# EAGLE board MiniMoto-Panel-v10 (EAGLE 6.4), part 1 of 2
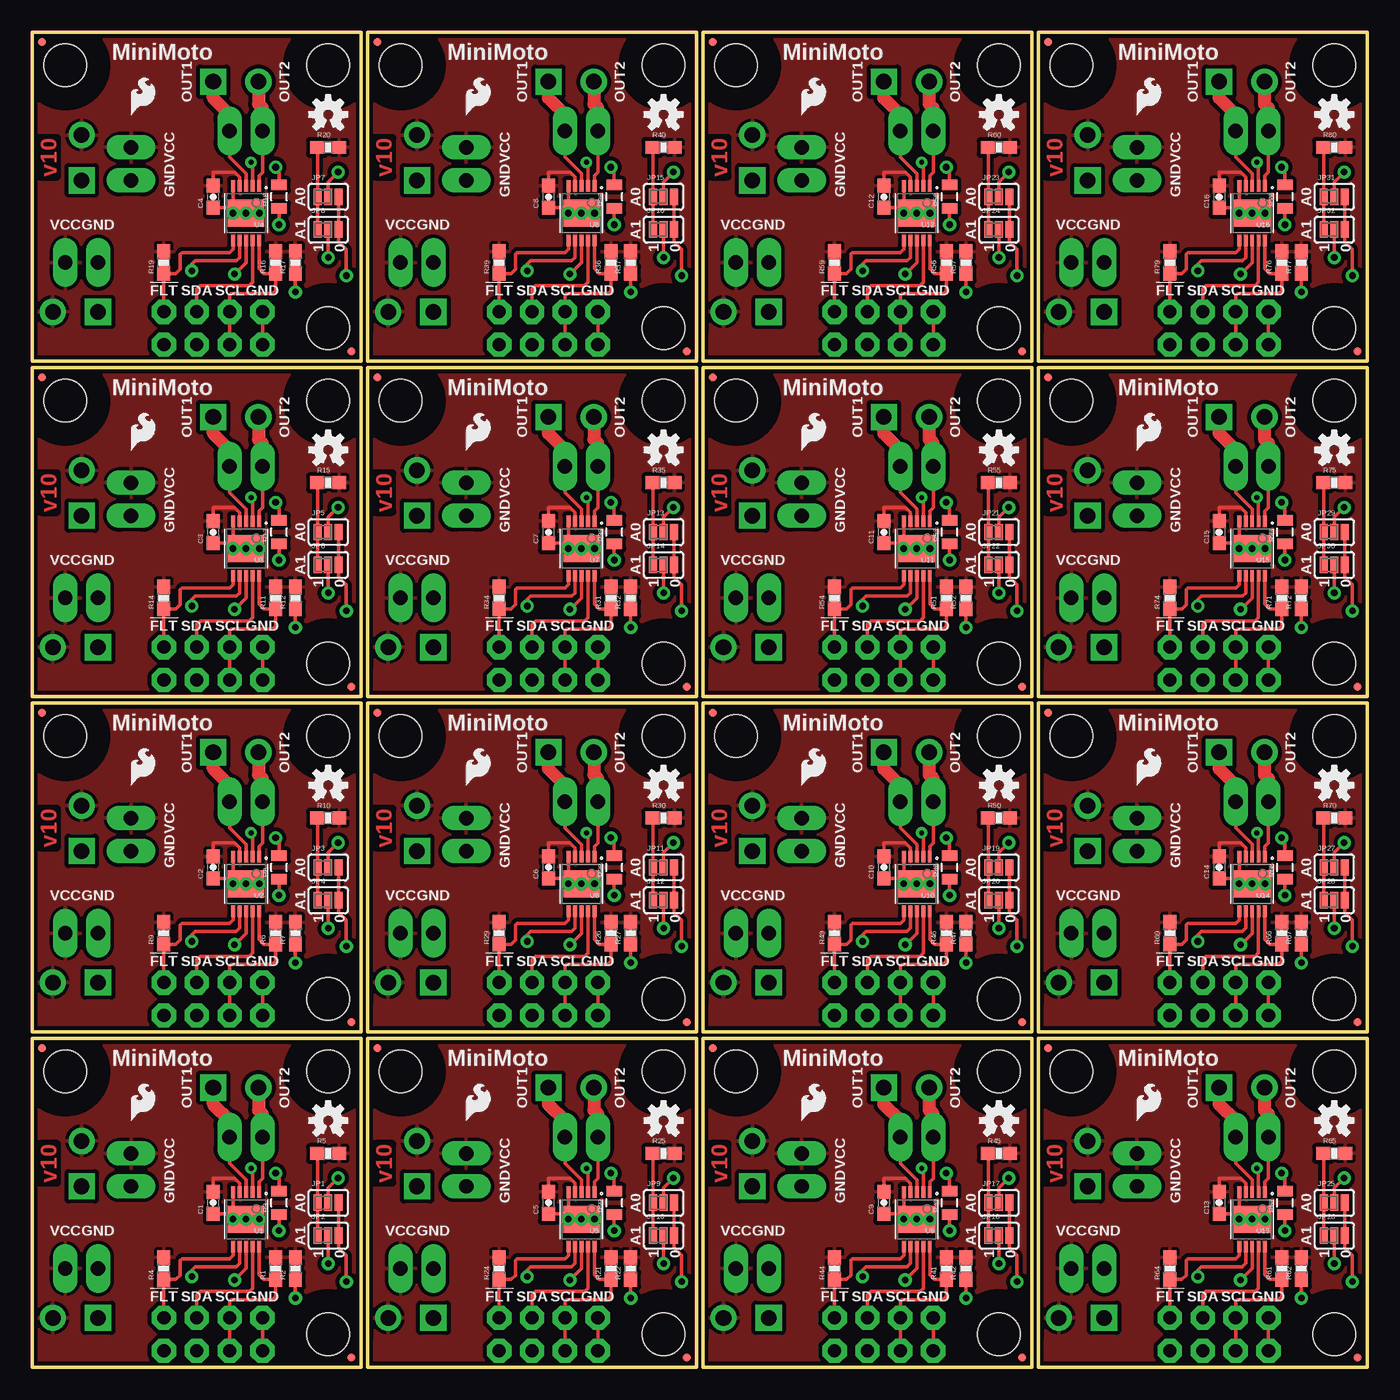
[diagram p0: board, top side]
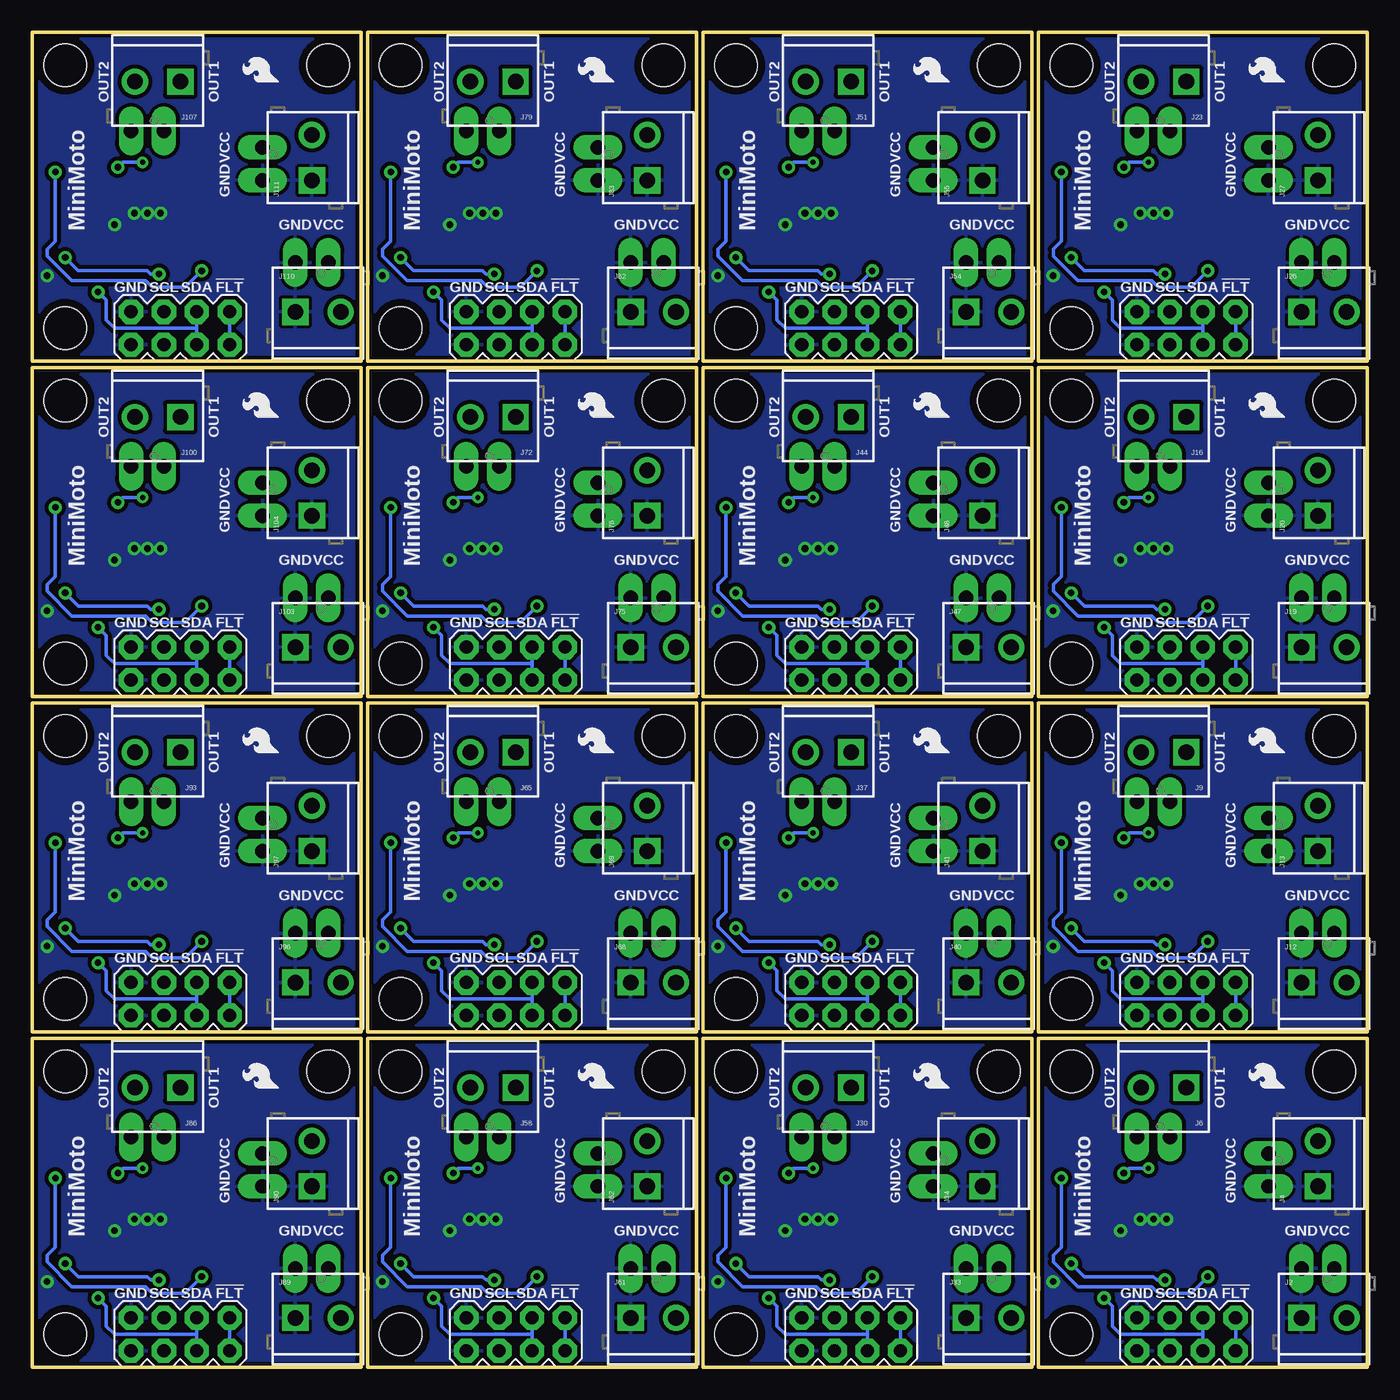
[diagram p1: board, bottom side, seen from below]

Size 103.12 x 103.12 mm. Coordinates in mm from the lower left corner, seen from the top.
Outline: 0,0 0,25.4 25.4,25.4 25.4,0 0,0
Outline: 0,25.91 0,51.31 25.4,51.31 25.4,25.91 0,25.91
Outline: 0,51.82 0,77.22 25.4,77.22 25.4,51.82 0,51.82
Outline: 0,77.72 0,103.12 25.4,103.12 25.4,77.72 0,77.72
Outline: 25.91,0 25.91,25.4 51.31,25.4 51.31,0 25.91,0
Outline: 25.91,25.91 25.91,51.31 51.31,51.31 51.31,25.91 25.91,25.91
Outline: 25.91,51.82 25.91,77.22 51.31,77.22 51.31,51.82 25.91,51.82
Outline: 25.91,77.72 25.91,103.12 51.31,103.12 51.31,77.72 25.91,77.72
Outline: 51.82,0 51.82,25.4 77.22,25.4 77.22,0 51.82,0
Outline: 51.82,25.91 51.82,51.31 77.22,51.31 77.22,25.91 51.82,25.91
Outline: 51.82,51.82 51.82,77.22 77.22,77.22 77.22,51.82 51.82,51.82
Outline: 51.82,77.72 51.82,103.12 77.22,103.12 77.22,77.72 51.82,77.72
Outline: 77.72,0 77.72,25.4 103.12,25.4 103.12,0 77.72,0
Outline: 77.72,25.91 77.72,51.31 103.12,51.31 103.12,25.91 77.72,25.91
Outline: 77.72,51.82 77.72,77.22 103.12,77.22 103.12,51.82 77.72,51.82
Outline: 77.72,77.72 77.72,103.12 103.12,103.12 103.12,77.72 77.72,77.72
Copper layers (1*16): Top 0.035mm / dielectric 1.5mm / Bottom 0.035mm
Design rules "Sparkfun": minimum track width 8mil, minimum drill 20mil, track to track 8mil, track to pad 8mil, pad to pad 8mil, via to via 8mil, smd to smd 8mil, copper to edge 8mil, drill to drill 8mil, minimum pad ring 12mil, minimum via ring 10mil, stop-mask expansion 4mil, vias tented up to drill 20mil, thermal gap 10mil
tRestrict: area -0.5,19.8 to 5.6,25.9; area 19.8,19.8 to 25.9,25.9; area 19.8,-0.5 to 25.9,5.6; area -0.5,45.7 to 5.6,51.8; area 19.8,45.7 to 25.9,51.8; area 19.8,25.4 to 25.9,31.5; area -0.5,71.6 to 5.6,77.7; area 19.8,71.6 to 25.9,77.7; area 19.8,51.3 to 25.9,57.4; area -0.5,97.5 to 5.6,103.6; area 19.8,97.5 to 25.9,103.6; area 19.8,77.2 to 25.9,83.3; area 25.4,19.8 to 31.5,25.9; area 45.7,19.8 to 51.8,25.9; area 45.7,-0.5 to 51.8,5.6; area 25.4,45.7 to 31.5,51.8; area 45.7,45.7 to 51.8,51.8; area 45.7,25.4 to 51.8,31.5; area 25.4,71.6 to 31.5,77.7; area 45.7,71.6 to 51.8,77.7; area 45.7,51.3 to 51.8,57.4; area 25.4,97.5 to 31.5,103.6; area 45.7,97.5 to 51.8,103.6; area 45.7,77.2 to 51.8,83.3; area 51.3,19.8 to 57.4,25.9; area 71.6,19.8 to 77.7,25.9; area 71.6,-0.5 to 77.7,5.6; area 51.3,45.7 to 57.4,51.8; area 71.6,45.7 to 77.7,51.8; area 71.6,25.4 to 77.7,31.5; area 51.3,71.6 to 57.4,77.7; area 71.6,71.6 to 77.7,77.7; area 71.6,51.3 to 77.7,57.4; area 51.3,97.5 to 57.4,103.6; area 71.6,97.5 to 77.7,103.6; area 71.6,77.2 to 77.7,83.3; area 77.2,19.8 to 83.3,25.9; area 97.5,19.8 to 103.6,25.9; area 97.5,-0.5 to 103.6,5.6; area 77.2,45.7 to 83.3,51.8; area 97.5,45.7 to 103.6,51.8; area 97.5,25.4 to 103.6,31.5; area 77.2,71.6 to 83.3,77.7; area 97.5,71.6 to 103.6,77.7; area 97.5,51.3 to 103.6,57.4; area 77.2,97.5 to 83.3,103.6; area 97.5,97.5 to 103.6,103.6; area 97.5,77.2 to 103.6,83.3

## Footprints (pad centres in the part's own frame; a part is rotated, then mirrored left to right if it is on the bottom)
0603-CAP = smd 1.1 x 1: 1 -0.85,0; 2 0.85,0
MICRO-FIDUCIAL = smd 0.635 x 0.635: 1 0,0
1X02_LONGPADS = drill 1.118 pad 1.88 long: 1 0,0; 2 2.54,0
SCREWTERMINAL-3.5MM-2 = drill 1.2 pad 2.032 square: 1 0,0 | drill 1.2 pad 2.032: 2 3.5,0
2X4 = drill 1.016 pad 1.88 octagon: 1 -3.81,-1.27; 2 -3.81,1.27; 3 -1.27,-1.27; 4 -1.27,1.27; 5 1.27,-1.27; 6 1.27,1.27; 7 3.81,-1.27; 8 3.81,1.27
SJ_3_PASTE1&2 = smd 0.635 x 1.27: 1 -0.813,0; 2 0,0; 3 0.813,0
0603-RES = smd 1.1 x 1: 1 -0.85,0; 2 0.85,0
0805 = smd 0.8 x 1.2: 1 -0.9,0; 2 0.9,0
STAND-OFF = hole 3.302: 0,0
MSOP-10-GNDPAD = smd 0.305 x 0.889: 1 -1,-2.11; 2 -0.5,-2.11; 3 0,-2.11; 4 0.5,-2.11; 5 1,-2.11; 6 1,2.11; 7 0.5,2.11; 8 0,2.11; 9 -0.5,2.11; 10 -1,2.11 | smd 2.794 x 2.083: GND 0,0

## Placement (x,y rotation side)
C1  0.1uF  [0603-CAP]  13.97,12.7 90 top
C2  0.1uF  [0603-CAP]  13.97,38.61 90 top
C3  0.1uF  [0603-CAP]  13.97,64.52 90 top
C4  0.1uF  [0603-CAP]  13.97,90.42 90 top
C5  0.1uF  [0603-CAP]  39.88,12.7 90 top
C6  0.1uF  [0603-CAP]  39.88,38.61 90 top
C7  0.1uF  [0603-CAP]  39.88,64.52 90 top
C8  0.1uF  [0603-CAP]  39.88,90.42 90 top
C9  0.1uF  [0603-CAP]  65.79,12.7 90 top
C10  0.1uF  [0603-CAP]  65.79,38.61 90 top
C11  0.1uF  [0603-CAP]  65.79,64.52 90 top
C12  0.1uF  [0603-CAP]  65.79,90.42 90 top
C13  0.1uF  [0603-CAP]  91.69,12.7 90 top
C14  0.1uF  [0603-CAP]  91.69,38.61 90 top
C15  0.1uF  [0603-CAP]  91.69,64.52 90 top
C16  0.1uF  [0603-CAP]  91.69,90.42 90 top
FID1  FIDUCIALUFIDUCIAL  [MICRO-FIDUCIAL]  0.76,24.64 0 top
FID2  FIDUCIALUFIDUCIAL  [MICRO-FIDUCIAL]  24.64,0.76 0 top
FID3  FIDUCIALUFIDUCIAL  [MICRO-FIDUCIAL]  0.76,50.55 0 top
FID4  FIDUCIALUFIDUCIAL  [MICRO-FIDUCIAL]  24.64,26.67 0 top
FID5  FIDUCIALUFIDUCIAL  [MICRO-FIDUCIAL]  0.76,76.45 0 top
FID6  FIDUCIALUFIDUCIAL  [MICRO-FIDUCIAL]  24.64,52.58 0 top
FID7  FIDUCIALUFIDUCIAL  [MICRO-FIDUCIAL]  0.76,102.36 0 top
FID8  FIDUCIALUFIDUCIAL  [MICRO-FIDUCIAL]  24.64,78.49 0 top
FID9  FIDUCIALUFIDUCIAL  [MICRO-FIDUCIAL]  26.67,24.64 0 top
FID10  FIDUCIALUFIDUCIAL  [MICRO-FIDUCIAL]  50.55,0.76 0 top
FID11  FIDUCIALUFIDUCIAL  [MICRO-FIDUCIAL]  26.67,50.55 0 top
FID12  FIDUCIALUFIDUCIAL  [MICRO-FIDUCIAL]  50.55,26.67 0 top
FID13  FIDUCIALUFIDUCIAL  [MICRO-FIDUCIAL]  26.67,76.45 0 top
FID14  FIDUCIALUFIDUCIAL  [MICRO-FIDUCIAL]  50.55,52.58 0 top
FID15  FIDUCIALUFIDUCIAL  [MICRO-FIDUCIAL]  26.67,102.36 0 top
FID16  FIDUCIALUFIDUCIAL  [MICRO-FIDUCIAL]  50.55,78.49 0 top
FID17  FIDUCIALUFIDUCIAL  [MICRO-FIDUCIAL]  52.58,24.64 0 top
FID18  FIDUCIALUFIDUCIAL  [MICRO-FIDUCIAL]  76.45,0.76 0 top
FID19  FIDUCIALUFIDUCIAL  [MICRO-FIDUCIAL]  52.58,50.55 0 top
FID20  FIDUCIALUFIDUCIAL  [MICRO-FIDUCIAL]  76.45,26.67 0 top
FID21  FIDUCIALUFIDUCIAL  [MICRO-FIDUCIAL]  52.58,76.45 0 top
FID22  FIDUCIALUFIDUCIAL  [MICRO-FIDUCIAL]  76.45,52.58 0 top
FID23  FIDUCIALUFIDUCIAL  [MICRO-FIDUCIAL]  52.58,102.36 0 top
FID24  FIDUCIALUFIDUCIAL  [MICRO-FIDUCIAL]  76.45,78.49 0 top
FID25  FIDUCIALUFIDUCIAL  [MICRO-FIDUCIAL]  78.49,24.64 0 top
FID26  FIDUCIALUFIDUCIAL  [MICRO-FIDUCIAL]  102.36,0.76 0 top
FID27  FIDUCIALUFIDUCIAL  [MICRO-FIDUCIAL]  78.49,50.55 0 top
FID28  FIDUCIALUFIDUCIAL  [MICRO-FIDUCIAL]  102.36,26.67 0 top
FID29  FIDUCIALUFIDUCIAL  [MICRO-FIDUCIAL]  78.49,76.45 0 top
FID30  FIDUCIALUFIDUCIAL  [MICRO-FIDUCIAL]  102.36,52.58 0 top
FID31  FIDUCIALUFIDUCIAL  [MICRO-FIDUCIAL]  78.49,102.36 0 top
FID32  FIDUCIALUFIDUCIAL  [MICRO-FIDUCIAL]  102.36,78.49 0 top
J1  M02PTH3  [1X02_LONGPADS]  5.08,7.62 0 bottom
J2  M023.5MM  [SCREWTERMINAL-3.5MM-2]  5.08,3.81 0 bottom
J3  M02PTH3  [1X02_LONGPADS]  7.62,13.97 90 top
J4  M023.5MM  [SCREWTERMINAL-3.5MM-2]  3.81,13.97 90 bottom
J5  M02PTH3  [1X02_LONGPADS]  15.24,17.78 180 bottom
J6  M023.5MM  [SCREWTERMINAL-3.5MM-2]  13.97,21.59 180 bottom
J7  M04X2  [2X4]  13.97,2.54 180 bottom
J8  M02PTH3  [1X02_LONGPADS]  15.24,43.69 180 bottom
J9  M023.5MM  [SCREWTERMINAL-3.5MM-2]  13.97,47.5 180 bottom
J10  M04X2  [2X4]  13.97,28.45 180 bottom
J11  M02PTH3  [1X02_LONGPADS]  5.08,33.53 0 bottom
J12  M023.5MM  [SCREWTERMINAL-3.5MM-2]  5.08,29.72 0 bottom
J13  M023.5MM  [SCREWTERMINAL-3.5MM-2]  3.81,39.88 90 bottom
J14  M02PTH3  [1X02_LONGPADS]  7.62,39.88 90 top
J15  M02PTH3  [1X02_LONGPADS]  15.24,69.6 180 bottom
J16  M023.5MM  [SCREWTERMINAL-3.5MM-2]  13.97,73.41 180 bottom
J17  M04X2  [2X4]  13.97,54.36 180 bottom
J18  M02PTH3  [1X02_LONGPADS]  5.08,59.44 0 bottom
J19  M023.5MM  [SCREWTERMINAL-3.5MM-2]  5.08,55.63 0 bottom
J20  M023.5MM  [SCREWTERMINAL-3.5MM-2]  3.81,65.79 90 bottom
J21  M02PTH3  [1X02_LONGPADS]  7.62,65.79 90 top
J22  M02PTH3  [1X02_LONGPADS]  15.24,95.5 180 bottom
J23  M023.5MM  [SCREWTERMINAL-3.5MM-2]  13.97,99.31 180 bottom
J24  M04X2  [2X4]  13.97,80.26 180 bottom
J25  M02PTH3  [1X02_LONGPADS]  5.08,85.34 0 bottom
J26  M023.5MM  [SCREWTERMINAL-3.5MM-2]  5.08,81.53 0 bottom
J27  M023.5MM  [SCREWTERMINAL-3.5MM-2]  3.81,91.69 90 bottom
J28  M02PTH3  [1X02_LONGPADS]  7.62,91.69 90 top
J29  M02PTH3  [1X02_LONGPADS]  41.15,17.78 180 bottom
J30  M023.5MM  [SCREWTERMINAL-3.5MM-2]  39.88,21.59 180 bottom
J31  M04X2  [2X4]  39.88,2.54 180 bottom
J32  M02PTH3  [1X02_LONGPADS]  30.99,7.62 0 bottom
J33  M023.5MM  [SCREWTERMINAL-3.5MM-2]  30.99,3.81 0 bottom
J34  M023.5MM  [SCREWTERMINAL-3.5MM-2]  29.72,13.97 90 bottom
J35  M02PTH3  [1X02_LONGPADS]  33.53,13.97 90 top
J36  M02PTH3  [1X02_LONGPADS]  41.15,43.69 180 bottom
J37  M023.5MM  [SCREWTERMINAL-3.5MM-2]  39.88,47.5 180 bottom
J38  M04X2  [2X4]  39.88,28.45 180 bottom
J39  M02PTH3  [1X02_LONGPADS]  30.99,33.53 0 bottom
J40  M023.5MM  [SCREWTERMINAL-3.5MM-2]  30.99,29.72 0 bottom
J41  M023.5MM  [SCREWTERMINAL-3.5MM-2]  29.72,39.88 90 bottom
J42  M02PTH3  [1X02_LONGPADS]  33.53,39.88 90 top
J43  M02PTH3  [1X02_LONGPADS]  41.15,69.6 180 bottom
J44  M023.5MM  [SCREWTERMINAL-3.5MM-2]  39.88,73.41 180 bottom
J45  M04X2  [2X4]  39.88,54.36 180 bottom
J46  M02PTH3  [1X02_LONGPADS]  30.99,59.44 0 bottom
J47  M023.5MM  [SCREWTERMINAL-3.5MM-2]  30.99,55.63 0 bottom
J48  M023.5MM  [SCREWTERMINAL-3.5MM-2]  29.72,65.79 90 bottom
J49  M02PTH3  [1X02_LONGPADS]  33.53,65.79 90 top
J50  M02PTH3  [1X02_LONGPADS]  41.15,95.5 180 bottom
J51  M023.5MM  [SCREWTERMINAL-3.5MM-2]  39.88,99.31 180 bottom
J52  M04X2  [2X4]  39.88,80.26 180 bottom
J53  M02PTH3  [1X02_LONGPADS]  30.99,85.34 0 bottom
J54  M023.5MM  [SCREWTERMINAL-3.5MM-2]  30.99,81.53 0 bottom
J55  M023.5MM  [SCREWTERMINAL-3.5MM-2]  29.72,91.69 90 bottom
J56  M02PTH3  [1X02_LONGPADS]  33.53,91.69 90 top
J57  M02PTH3  [1X02_LONGPADS]  67.06,17.78 180 bottom
J58  M023.5MM  [SCREWTERMINAL-3.5MM-2]  65.79,21.59 180 bottom
J59  M04X2  [2X4]  65.79,2.54 180 bottom
J60  M02PTH3  [1X02_LONGPADS]  56.9,7.62 0 bottom
J61  M023.5MM  [SCREWTERMINAL-3.5MM-2]  56.9,3.81 0 bottom
J62  M023.5MM  [SCREWTERMINAL-3.5MM-2]  55.63,13.97 90 bottom
J63  M02PTH3  [1X02_LONGPADS]  59.44,13.97 90 top
J64  M02PTH3  [1X02_LONGPADS]  67.06,43.69 180 bottom
J65  M023.5MM  [SCREWTERMINAL-3.5MM-2]  65.79,47.5 180 bottom
J66  M04X2  [2X4]  65.79,28.45 180 bottom
J67  M02PTH3  [1X02_LONGPADS]  56.9,33.53 0 bottom
J68  M023.5MM  [SCREWTERMINAL-3.5MM-2]  56.9,29.72 0 bottom
J69  M023.5MM  [SCREWTERMINAL-3.5MM-2]  55.63,39.88 90 bottom
J70  M02PTH3  [1X02_LONGPADS]  59.44,39.88 90 top
J71  M02PTH3  [1X02_LONGPADS]  67.06,69.6 180 bottom
J72  M023.5MM  [SCREWTERMINAL-3.5MM-2]  65.79,73.41 180 bottom
J73  M04X2  [2X4]  65.79,54.36 180 bottom
J74  M02PTH3  [1X02_LONGPADS]  56.9,59.44 0 bottom
J75  M023.5MM  [SCREWTERMINAL-3.5MM-2]  56.9,55.63 0 bottom
J76  M023.5MM  [SCREWTERMINAL-3.5MM-2]  55.63,65.79 90 bottom
J77  M02PTH3  [1X02_LONGPADS]  59.44,65.79 90 top
J78  M02PTH3  [1X02_LONGPADS]  67.06,95.5 180 bottom
J79  M023.5MM  [SCREWTERMINAL-3.5MM-2]  65.79,99.31 180 bottom
J80  M04X2  [2X4]  65.79,80.26 180 bottom
J81  M02PTH3  [1X02_LONGPADS]  56.9,85.34 0 bottom
J82  M023.5MM  [SCREWTERMINAL-3.5MM-2]  56.9,81.53 0 bottom
J83  M023.5MM  [SCREWTERMINAL-3.5MM-2]  55.63,91.69 90 bottom
J84  M02PTH3  [1X02_LONGPADS]  59.44,91.69 90 top
J85  M02PTH3  [1X02_LONGPADS]  92.96,17.78 180 bottom
J86  M023.5MM  [SCREWTERMINAL-3.5MM-2]  91.69,21.59 180 bottom
J87  M04X2  [2X4]  91.69,2.54 180 bottom
J88  M02PTH3  [1X02_LONGPADS]  82.8,7.62 0 bottom
J89  M023.5MM  [SCREWTERMINAL-3.5MM-2]  82.8,3.81 0 bottom
J90  M023.5MM  [SCREWTERMINAL-3.5MM-2]  81.53,13.97 90 bottom
J91  M02PTH3  [1X02_LONGPADS]  85.34,13.97 90 top
J92  M02PTH3  [1X02_LONGPADS]  92.96,43.69 180 bottom
J93  M023.5MM  [SCREWTERMINAL-3.5MM-2]  91.69,47.5 180 bottom
J94  M04X2  [2X4]  91.69,28.45 180 bottom
J95  M02PTH3  [1X02_LONGPADS]  82.8,33.53 0 bottom
J96  M023.5MM  [SCREWTERMINAL-3.5MM-2]  82.8,29.72 0 bottom
J97  M023.5MM  [SCREWTERMINAL-3.5MM-2]  81.53,39.88 90 bottom
J98  M02PTH3  [1X02_LONGPADS]  85.34,39.88 90 top
J99  M02PTH3  [1X02_LONGPADS]  92.96,69.6 180 bottom
J100  M023.5MM  [SCREWTERMINAL-3.5MM-2]  91.69,73.41 180 bottom
J101  M04X2  [2X4]  91.69,54.36 180 bottom
J102  M02PTH3  [1X02_LONGPADS]  82.8,59.44 0 bottom
J103  M023.5MM  [SCREWTERMINAL-3.5MM-2]  82.8,55.63 0 bottom
J104  M023.5MM  [SCREWTERMINAL-3.5MM-2]  81.53,65.79 90 bottom
J105  M02PTH3  [1X02_LONGPADS]  85.34,65.79 90 top
J106  M02PTH3  [1X02_LONGPADS]  92.96,95.5 180 bottom
J107  M023.5MM  [SCREWTERMINAL-3.5MM-2]  91.69,99.31 180 bottom
J108  M04X2  [2X4]  91.69,80.26 180 bottom
J109  M02PTH3  [1X02_LONGPADS]  82.8,85.34 0 bottom
J110  M023.5MM  [SCREWTERMINAL-3.5MM-2]  82.8,81.53 0 bottom
J111  M023.5MM  [SCREWTERMINAL-3.5MM-2]  81.53,91.69 90 bottom
J112  M02PTH3  [1X02_LONGPADS]  85.34,91.69 90 top
JP1  JUMPER-31-2  [SJ_3_PASTE1&2]  22.86,12.7 0 top
JP2  JUMPER-31-2  [SJ_3_PASTE1&2]  22.86,10.16 0 top
JP3  JUMPER-31-2  [SJ_3_PASTE1&2]  22.86,38.61 0 top
JP4  JUMPER-31-2  [SJ_3_PASTE1&2]  22.86,36.07 0 top
JP5  JUMPER-31-2  [SJ_3_PASTE1&2]  22.86,64.52 0 top
JP6  JUMPER-31-2  [SJ_3_PASTE1&2]  22.86,61.98 0 top
JP7  JUMPER-31-2  [SJ_3_PASTE1&2]  22.86,90.42 0 top
JP8  JUMPER-31-2  [SJ_3_PASTE1&2]  22.86,87.88 0 top
JP9  JUMPER-31-2  [SJ_3_PASTE1&2]  48.77,12.7 0 top
JP10  JUMPER-31-2  [SJ_3_PASTE1&2]  48.77,10.16 0 top
JP11  JUMPER-31-2  [SJ_3_PASTE1&2]  48.77,38.61 0 top
JP12  JUMPER-31-2  [SJ_3_PASTE1&2]  48.77,36.07 0 top
JP13  JUMPER-31-2  [SJ_3_PASTE1&2]  48.77,64.52 0 top
JP14  JUMPER-31-2  [SJ_3_PASTE1&2]  48.77,61.98 0 top
JP15  JUMPER-31-2  [SJ_3_PASTE1&2]  48.77,90.42 0 top
JP16  JUMPER-31-2  [SJ_3_PASTE1&2]  48.77,87.88 0 top
JP17  JUMPER-31-2  [SJ_3_PASTE1&2]  74.68,12.7 0 top
JP18  JUMPER-31-2  [SJ_3_PASTE1&2]  74.68,10.16 0 top
JP19  JUMPER-31-2  [SJ_3_PASTE1&2]  74.68,38.61 0 top
JP20  JUMPER-31-2  [SJ_3_PASTE1&2]  74.68,36.07 0 top
JP21  JUMPER-31-2  [SJ_3_PASTE1&2]  74.68,64.52 0 top
JP22  JUMPER-31-2  [SJ_3_PASTE1&2]  74.68,61.98 0 top
JP23  JUMPER-31-2  [SJ_3_PASTE1&2]  74.68,90.42 0 top
JP24  JUMPER-31-2  [SJ_3_PASTE1&2]  74.68,87.88 0 top
JP25  JUMPER-31-2  [SJ_3_PASTE1&2]  100.58,12.7 0 top
JP26  JUMPER-31-2  [SJ_3_PASTE1&2]  100.58,10.16 0 top
JP27  JUMPER-31-2  [SJ_3_PASTE1&2]  100.58,38.61 0 top
JP28  JUMPER-31-2  [SJ_3_PASTE1&2]  100.58,36.07 0 top
JP29  JUMPER-31-2  [SJ_3_PASTE1&2]  100.58,64.52 0 top
JP30  JUMPER-31-2  [SJ_3_PASTE1&2]  100.58,61.98 0 top
JP31  JUMPER-31-2  [SJ_3_PASTE1&2]  100.58,90.42 0 top
JP32  JUMPER-31-2  [SJ_3_PASTE1&2]  100.58,87.88 0 top
LOGO1  LOGO-SFESK  [SFE-LOGO-FLAME]  7.62,19.05 0 top
LOGO2  OSHW-LOGOS  [OSHW-LOGO-S]  22.86,19.05 0 top
LOGO3  LOGO-SFESK  [SFE-LOGO-FLAME]  6.35,21.59 90 bottom
LOGO4  OSHW-LOGOS  [OSHW-LOGO-S]  22.86,44.96 0 top
LOGO5  LOGO-SFESK  [SFE-LOGO-FLAME]  7.62,44.96 0 top
LOGO6  LOGO-SFESK  [SFE-LOGO-FLAME]  6.35,47.5 90 bottom
LOGO7  OSHW-LOGOS  [OSHW-LOGO-S]  22.86,70.87 0 top
LOGO8  LOGO-SFESK  [SFE-LOGO-FLAME]  7.62,70.87 0 top
LOGO9  LOGO-SFESK  [SFE-LOGO-FLAME]  6.35,73.41 90 bottom
LOGO10  OSHW-LOGOS  [OSHW-LOGO-S]  22.86,96.77 0 top
LOGO11  LOGO-SFESK  [SFE-LOGO-FLAME]  7.62,96.77 0 top
LOGO12  LOGO-SFESK  [SFE-LOGO-FLAME]  6.35,99.31 90 bottom
LOGO13  OSHW-LOGOS  [OSHW-LOGO-S]  48.77,19.05 0 top
LOGO14  LOGO-SFESK  [SFE-LOGO-FLAME]  33.53,19.05 0 top
LOGO15  LOGO-SFESK  [SFE-LOGO-FLAME]  32.26,21.59 90 bottom
LOGO16  OSHW-LOGOS  [OSHW-LOGO-S]  48.77,44.96 0 top
LOGO17  LOGO-SFESK  [SFE-LOGO-FLAME]  33.53,44.96 0 top
LOGO18  LOGO-SFESK  [SFE-LOGO-FLAME]  32.26,47.5 90 bottom
LOGO19  OSHW-LOGOS  [OSHW-LOGO-S]  48.77,70.87 0 top
LOGO20  LOGO-SFESK  [SFE-LOGO-FLAME]  33.53,70.87 0 top
LOGO21  LOGO-SFESK  [SFE-LOGO-FLAME]  32.26,73.41 90 bottom
LOGO22  OSHW-LOGOS  [OSHW-LOGO-S]  48.77,96.77 0 top
LOGO23  LOGO-SFESK  [SFE-LOGO-FLAME]  33.53,96.77 0 top
LOGO24  LOGO-SFESK  [SFE-LOGO-FLAME]  32.26,99.31 90 bottom
LOGO25  OSHW-LOGOS  [OSHW-LOGO-S]  74.68,19.05 0 top
LOGO26  LOGO-SFESK  [SFE-LOGO-FLAME]  59.44,19.05 0 top
LOGO27  LOGO-SFESK  [SFE-LOGO-FLAME]  58.17,21.59 90 bottom
LOGO28  OSHW-LOGOS  [OSHW-LOGO-S]  74.68,44.96 0 top
LOGO29  LOGO-SFESK  [SFE-LOGO-FLAME]  59.44,44.96 0 top
LOGO30  LOGO-SFESK  [SFE-LOGO-FLAME]  58.17,47.5 90 bottom
LOGO31  OSHW-LOGOS  [OSHW-LOGO-S]  74.68,70.87 0 top
LOGO32  LOGO-SFESK  [SFE-LOGO-FLAME]  59.44,70.87 0 top
LOGO33  LOGO-SFESK  [SFE-LOGO-FLAME]  58.17,73.41 90 bottom
LOGO34  OSHW-LOGOS  [OSHW-LOGO-S]  74.68,96.77 0 top
LOGO35  LOGO-SFESK  [SFE-LOGO-FLAME]  59.44,96.77 0 top
LOGO36  LOGO-SFESK  [SFE-LOGO-FLAME]  58.17,99.31 90 bottom
LOGO37  OSHW-LOGOS  [OSHW-LOGO-S]  100.58,19.05 0 top
LOGO38  LOGO-SFESK  [SFE-LOGO-FLAME]  85.34,19.05 0 top
LOGO39  LOGO-SFESK  [SFE-LOGO-FLAME]  84.07,21.59 90 bottom
LOGO40  OSHW-LOGOS  [OSHW-LOGO-S]  100.58,44.96 0 top
LOGO41  LOGO-SFESK  [SFE-LOGO-FLAME]  85.34,44.96 0 top
LOGO42  LOGO-SFESK  [SFE-LOGO-FLAME]  84.07,47.5 90 bottom
LOGO43  OSHW-LOGOS  [OSHW-LOGO-S]  100.58,70.87 0 top
LOGO44  LOGO-SFESK  [SFE-LOGO-FLAME]  85.34,70.87 0 top
LOGO45  LOGO-SFESK  [SFE-LOGO-FLAME]  84.07,73.41 90 bottom
LOGO46  OSHW-LOGOS  [OSHW-LOGO-S]  100.58,96.77 0 top
LOGO47  LOGO-SFESK  [SFE-LOGO-FLAME]  85.34,96.77 0 top
LOGO48  LOGO-SFESK  [SFE-LOGO-FLAME]  84.07,99.31 90 bottom
R1  1K  [0603-RES]  18.8,7.62 90 top
R2  1K  [0603-RES]  20.32,7.62 90 top
R3  0.22  [0805]  19.05,12.7 90 top
R4  10K  [0603-RES]  10.16,7.62 90 top
R5  10K  [0603-RES]  22.86,16.51 0 top
R6  1K  [0603-RES]  18.8,33.53 90 top
R7  1K  [0603-RES]  20.32,33.53 90 top
R8  0.22  [0805]  19.05,38.61 90 top
R9  10K  [0603-RES]  10.16,33.53 90 top
R10  10K  [0603-RES]  22.86,42.42 0 top
R11  1K  [0603-RES]  18.8,59.44 90 top
R12  1K  [0603-RES]  20.32,59.44 90 top
R13  0.22  [0805]  19.05,64.52 90 top
R14  10K  [0603-RES]  10.16,59.44 90 top
R15  10K  [0603-RES]  22.86,68.33 0 top
R16  1K  [0603-RES]  18.8,85.34 90 top
R17  1K  [0603-RES]  20.32,85.34 90 top
R18  0.22  [0805]  19.05,90.42 90 top
R19  10K  [0603-RES]  10.16,85.34 90 top
R20  10K  [0603-RES]  22.86,94.23 0 top
R21  1K  [0603-RES]  44.7,7.62 90 top
R22  1K  [0603-RES]  46.23,7.62 90 top
R23  0.22  [0805]  44.96,12.7 90 top
R24  10K  [0603-RES]  36.07,7.62 90 top
R25  10K  [0603-RES]  48.77,16.51 0 top
R26  1K  [0603-RES]  44.7,33.53 90 top
R27  1K  [0603-RES]  46.23,33.53 90 top
R28  0.22  [0805]  44.96,38.61 90 top
R29  10K  [0603-RES]  36.07,33.53 90 top
R30  10K  [0603-RES]  48.77,42.42 0 top
R31  1K  [0603-RES]  44.7,59.44 90 top
R32  1K  [0603-RES]  46.23,59.44 90 top
R33  0.22  [0805]  44.96,64.52 90 top
R34  10K  [0603-RES]  36.07,59.44 90 top
R35  10K  [0603-RES]  48.77,68.33 0 top
R36  1K  [0603-RES]  44.7,85.34 90 top
R37  1K  [0603-RES]  46.23,85.34 90 top
R38  0.22  [0805]  44.96,90.42 90 top
R39  10K  [0603-RES]  36.07,85.34 90 top
R40  10K  [0603-RES]  48.77,94.23 0 top
R41  1K  [0603-RES]  70.61,7.62 90 top
R42  1K  [0603-RES]  72.14,7.62 90 top
R43  0.22  [0805]  70.87,12.7 90 top
R44  10K  [0603-RES]  61.98,7.62 90 top
R45  10K  [0603-RES]  74.68,16.51 0 top
R46  1K  [0603-RES]  70.61,33.53 90 top
R47  1K  [0603-RES]  72.14,33.53 90 top
R48  0.22  [0805]  70.87,38.61 90 top
R49  10K  [0603-RES]  61.98,33.53 90 top
R50  10K  [0603-RES]  74.68,42.42 0 top
R51  1K  [0603-RES]  70.61,59.44 90 top
R52  1K  [0603-RES]  72.14,59.44 90 top
R53  0.22  [0805]  70.87,64.52 90 top
R54  10K  [0603-RES]  61.98,59.44 90 top
R55  10K  [0603-RES]  74.68,68.33 0 top
R56  1K  [0603-RES]  70.61,85.34 90 top
R57  1K  [0603-RES]  72.14,85.34 90 top
R58  0.22  [0805]  70.87,90.42 90 top
R59  10K  [0603-RES]  61.98,85.34 90 top
R60  10K  [0603-RES]  74.68,94.23 0 top
R61  1K  [0603-RES]  96.52,7.62 90 top
R62  1K  [0603-RES]  98.04,7.62 90 top
R63  0.22  [0805]  96.77,12.7 90 top
R64  10K  [0603-RES]  87.88,7.62 90 top
R65  10K  [0603-RES]  100.58,16.51 0 top
R66  1K  [0603-RES]  96.52,33.53 90 top
R67  1K  [0603-RES]  98.04,33.53 90 top
R68  0.22  [0805]  96.77,38.61 90 top
R69  10K  [0603-RES]  87.88,33.53 90 top
R70  10K  [0603-RES]  100.58,42.42 0 top
R71  1K  [0603-RES]  96.52,59.44 90 top
R72  1K  [0603-RES]  98.04,59.44 90 top
R73  0.22  [0805]  96.77,64.52 90 top
R74  10K  [0603-RES]  87.88,59.44 90 top
R75  10K  [0603-RES]  100.58,68.33 0 top
R76  1K  [0603-RES]  96.52,85.34 90 top
R77  1K  [0603-RES]  98.04,85.34 90 top
R78  0.22  [0805]  96.77,90.42 90 top
R79  10K  [0603-RES]  87.88,85.34 90 top
R80  10K  [0603-RES]  100.58,94.23 0 top
STANDOFF1  STAND-OFF  [STAND-OFF]  2.54,22.86 0 top
STANDOFF2  STAND-OFF  [STAND-OFF]  22.86,22.86 0 top
STANDOFF3  STAND-OFF  [STAND-OFF]  22.86,2.54 0 top
STANDOFF4  STAND-OFF  [STAND-OFF]  2.54,48.77 0 top
STANDOFF5  STAND-OFF  [STAND-OFF]  22.86,48.77 0 top
STANDOFF6  STAND-OFF  [STAND-OFF]  22.86,28.45 0 top
STANDOFF7  STAND-OFF  [STAND-OFF]  2.54,74.68 0 top
STANDOFF8  STAND-OFF  [STAND-OFF]  22.86,74.68 0 top
STANDOFF9  STAND-OFF  [STAND-OFF]  22.86,54.36 0 top
STANDOFF10  STAND-OFF  [STAND-OFF]  2.54,100.58 0 top
STANDOFF11  STAND-OFF  [STAND-OFF]  22.86,100.58 0 top
STANDOFF12  STAND-OFF  [STAND-OFF]  22.86,80.26 0 top
STANDOFF13  STAND-OFF  [STAND-OFF]  28.45,22.86 0 top
STANDOFF14  STAND-OFF  [STAND-OFF]  48.77,22.86 0 top
STANDOFF15  STAND-OFF  [STAND-OFF]  48.77,2.54 0 top
STANDOFF16  STAND-OFF  [STAND-OFF]  28.45,48.77 0 top
STANDOFF17  STAND-OFF  [STAND-OFF]  48.77,48.77 0 top
STANDOFF18  STAND-OFF  [STAND-OFF]  48.77,28.45 0 top
STANDOFF19  STAND-OFF  [STAND-OFF]  28.45,74.68 0 top
STANDOFF20  STAND-OFF  [STAND-OFF]  48.77,74.68 0 top
STANDOFF21  STAND-OFF  [STAND-OFF]  48.77,54.36 0 top
STANDOFF22  STAND-OFF  [STAND-OFF]  28.45,100.58 0 top
STANDOFF23  STAND-OFF  [STAND-OFF]  48.77,100.58 0 top
STANDOFF24  STAND-OFF  [STAND-OFF]  48.77,80.26 0 top
STANDOFF25  STAND-OFF  [STAND-OFF]  54.36,22.86 0 top
STANDOFF26  STAND-OFF  [STAND-OFF]  74.68,22.86 0 top
STANDOFF27  STAND-OFF  [STAND-OFF]  74.68,2.54 0 top
STANDOFF28  STAND-OFF  [STAND-OFF]  54.36,48.77 0 top
STANDOFF29  STAND-OFF  [STAND-OFF]  74.68,48.77 0 top
STANDOFF30  STAND-OFF  [STAND-OFF]  74.68,28.45 0 top
STANDOFF31  STAND-OFF  [STAND-OFF]  54.36,74.68 0 top
STANDOFF32  STAND-OFF  [STAND-OFF]  74.68,74.68 0 top
STANDOFF33  STAND-OFF  [STAND-OFF]  74.68,54.36 0 top
STANDOFF34  STAND-OFF  [STAND-OFF]  54.36,100.58 0 top
STANDOFF35  STAND-OFF  [STAND-OFF]  74.68,100.58 0 top
STANDOFF36  STAND-OFF  [STAND-OFF]  74.68,80.26 0 top
STANDOFF37  STAND-OFF  [STAND-OFF]  80.26,22.86 0 top
STANDOFF38  STAND-OFF  [STAND-OFF]  100.58,22.86 0 top
STANDOFF39  STAND-OFF  [STAND-OFF]  100.58,2.54 0 top
STANDOFF40  STAND-OFF  [STAND-OFF]  80.26,48.77 0 top
STANDOFF41  STAND-OFF  [STAND-OFF]  100.58,48.77 0 top
STANDOFF42  STAND-OFF  [STAND-OFF]  100.58,28.45 0 top
STANDOFF43  STAND-OFF  [STAND-OFF]  80.26,74.68 0 top
STANDOFF44  STAND-OFF  [STAND-OFF]  100.58,74.68 0 top
STANDOFF45  STAND-OFF  [STAND-OFF]  100.58,54.36 0 top
STANDOFF46  STAND-OFF  [STAND-OFF]  80.26,100.58 0 top
STANDOFF47  STAND-OFF  [STAND-OFF]  100.58,100.58 0 top
STANDOFF48  STAND-OFF  [STAND-OFF]  100.58,80.26 0 top
U1  DRV8830  [MSOP-10-GNDPAD]  16.51,11.43 180 top
U2  DRV8830  [MSOP-10-GNDPAD]  16.51,37.34 180 top
U3  DRV8830  [MSOP-10-GNDPAD]  16.51,63.25 180 top
U4  DRV8830  [MSOP-10-GNDPAD]  16.51,89.15 180 top
U5  DRV8830  [MSOP-10-GNDPAD]  42.42,11.43 180 top
U6  DRV8830  [MSOP-10-GNDPAD]  42.42,37.34 180 top
U7  DRV8830  [MSOP-10-GNDPAD]  42.42,63.25 180 top
U8  DRV8830  [MSOP-10-GNDPAD]  42.42,89.15 180 top
U9  DRV8830  [MSOP-10-GNDPAD]  68.33,11.43 180 top
U10  DRV8830  [MSOP-10-GNDPAD]  68.33,37.34 180 top
U11  DRV8830  [MSOP-10-GNDPAD]  68.33,63.25 180 top
U12  DRV8830  [MSOP-10-GNDPAD]  68.33,89.15 180 top
U13  DRV8830  [MSOP-10-GNDPAD]  94.23,11.43 180 top
U14  DRV8830  [MSOP-10-GNDPAD]  94.23,37.34 180 top
U15  DRV8830  [MSOP-10-GNDPAD]  94.23,63.25 180 top
U16  DRV8830  [MSOP-10-GNDPAD]  94.23,89.15 180 top

## Library data of the parts
C1-C16 = SparkFun-Capacitors; PROD_ID: CAP-00810
FID1-FID32 LOGO1-LOGO48 = SparkFun-Aesthetics
J1-J112 = SparkFun-Connectors
JP1-JP32 = SparkFun-Passives
R1 R2 R6 R7 R11 R12 R16 R17 R21 R22 R26 R27 R31 R32 R36 R37 R41 R42 R46 R47 R51 R52 R56 R57 R61 R62 R66 R67 R71 R72 R76 R77 = SparkFun-Resistors; PROD_ID: RES-07856
R3 R8 R13 R18 R23 R28 R33 R38 R43 R48 R53 R58 R63 R68 R73 R78 = SparkFun-Resistors; PROD_ID: RES-09883
R4 R5 R9 R10 R14 R15 R19 R20 R24 R25 R29 R30 R34 R35 R39 R40 R44 R45 R49 R50 R54 R55 R59 R60 R64 R65 R69 R70 R74 R75 R79 R80 = SparkFun-Resistors; PROD_ID: RES-00824
STANDOFF1-STANDOFF48 = SparkFun-Electromechanical
U1-U16 = SparkFun-PowerIC

## Nets
!FAULT: J7.1 J7.2 R4.1 U1.6
!FAULT1: J10.1 J10.2 R9.1 U2.6
!FAULT2: J17.1 J17.2 R14.1 U3.6
!FAULT3: J24.1 J24.2 R19.1 U4.6
!FAULT4: J31.1 J31.2 R24.1 U5.6
!FAULT5: J38.1 J38.2 R29.1 U6.6
!FAULT6: J45.1 J45.2 R34.1 U7.6
!FAULT7: J52.1 J52.2 R39.1 U8.6
!FAULT8: J59.1 J59.2 R44.1 U9.6
!FAULT9: J66.1 J66.2 R49.1 U10.6
!FAULT10: J73.1 J73.2 R54.1 U11.6
!FAULT11: J80.1 J80.2 R59.1 U12.6
!FAULT12: J87.1 J87.2 R64.1 U13.6
!FAULT13: J94.1 J94.2 R69.1 U14.6
!FAULT14: J101.1 J101.2 R74.1 U15.6
!FAULT15: J108.1 J108.2 R79.1 U16.6
A0: JP1.2 U1.7
A1: JP2.2 U1.8
A2: JP3.2 U2.7
A3: JP4.2 U2.8
A4: JP5.2 U3.7
A5: JP6.2 U3.8
A6: JP7.2 U4.7
A7: JP8.2 U4.8
A8: JP9.2 U5.7
A9: JP10.2 U5.8
A10: JP11.2 U6.7
A11: JP12.2 U6.8
A12: JP13.2 U7.7
A13: JP14.2 U7.8
A14: JP15.2 U8.7
A15: JP16.2 U8.8
A16: JP17.2 U9.7
A17: JP18.2 U9.8
A18: JP19.2 U10.7
A19: JP20.2 U10.8
A20: JP21.2 U11.7
A21: JP22.2 U11.8
A22: JP23.2 U12.7
A23: JP24.2 U12.8
A24: JP25.2 U13.7
A25: JP26.2 U13.8
A26: JP27.2 U14.7
A27: JP28.2 U14.8
A28: JP29.2 U15.7
A29: JP30.2 U15.8
A30: JP31.2 U16.7
A31: JP32.2 U16.8
GND: C1.1 J1.1 J2.1 J3.1 J4.1 J7.7 J7.8 JP1.3 JP2.3 R3.1 U1.5 U1.GND
GND1: C2.1 J10.7 J10.8 J11.1 J12.1 J13.1 J14.1 JP3.3 JP4.3 R8.1 U2.5 U2.GND
GND2: C3.1 J17.7 J17.8 J18.1 J19.1 J20.1 J21.1 JP5.3 JP6.3 R13.1 U3.5 U3.GND
GND3: C4.1 J24.7 J24.8 J25.1 J26.1 J27.1 J28.1 JP7.3 JP8.3 R18.1 U4.5 U4.GND
GND4: C5.1 J31.7 J31.8 J32.1 J33.1 J34.1 J35.1 JP9.3 JP10.3 R23.1 U5.5 U5.GND
GND5: C6.1 J38.7 J38.8 J39.1 J40.1 J41.1 J42.1 JP11.3 JP12.3 R28.1 U6.5 U6.GND
GND6: C7.1 J45.7 J45.8 J46.1 J47.1 J48.1 J49.1 JP13.3 JP14.3 R33.1 U7.5 U7.GND
GND7: C8.1 J52.7 J52.8 J53.1 J54.1 J55.1 J56.1 JP15.3 JP16.3 R38.1 U8.5 U8.GND
GND8: C9.1 J59.7 J59.8 J60.1 J61.1 J62.1 J63.1 JP17.3 JP18.3 R43.1 U9.5 U9.GND
GND9: C10.1 J66.7 J66.8 J67.1 J68.1 J69.1 J70.1 JP19.3 JP20.3 R48.1 U10.5 U10.GND
GND10: C11.1 J73.7 J73.8 J74.1 J75.1 J76.1 J77.1 JP21.3 JP22.3 R53.1 U11.5 U11.GND
GND11: C12.1 J80.7 J80.8 J81.1 J82.1 J83.1 J84.1 JP23.3 JP24.3 R58.1 U12.5 U12.GND
GND12: C13.1 J87.7 J87.8 J88.1 J89.1 J90.1 J91.1 JP25.3 JP26.3 R63.1 U13.5 U13.GND
GND13: C14.1 J94.7 J94.8 J95.1 J96.1 J97.1 J98.1 JP27.3 JP28.3 R68.1 U14.5 U14.GND
GND14: C15.1 J101.7 J101.8 J102.1 J103.1 J104.1 J105.1 JP29.3 JP30.3 R73.1 U15.5 U15.GND
GND15: C16.1 J108.7 J108.8 J109.1 J110.1 J111.1 J112.1 JP31.3 JP32.3 R78.1 U16.5 U16.GND
N$1: JP1.1 JP2.1 R5.1
N$2: R8.2 U2.2
N$3: R3.2 U1.2
N$4: JP3.1 JP4.1 R10.1
N$5: R13.2 U3.2
N$6: JP5.1 JP6.1 R15.1
N$7: R18.2 U4.2
N$8: JP7.1 JP8.1 R20.1
N$9: R23.2 U5.2
N$10: JP9.1 JP10.1 R25.1
N$11: R28.2 U6.2
N$12: JP11.1 JP12.1 R30.1
N$13: R33.2 U7.2
N$14: JP13.1 JP14.1 R35.1
N$15: R38.2 U8.2
N$16: JP15.1 JP16.1 R40.1
N$17: R43.2 U9.2
N$18: JP17.1 JP18.1 R45.1
N$19: R48.2 U10.2
N$20: JP19.1 JP20.1 R50.1
N$21: R53.2 U11.2
N$22: JP21.1 JP22.1 R55.1
N$23: R58.2 U12.2
N$24: JP23.1 JP24.1 R60.1
N$25: R63.2 U13.2
N$26: JP25.1 JP26.1 R65.1
N$27: R68.2 U14.2
N$28: JP27.1 JP28.1 R70.1
N$29: R73.2 U15.2
N$30: JP29.1 JP30.1 R75.1
N$31: R78.2 U16.2
N$32: JP31.1 JP32.1 R80.1
OUT1: J5.1 J6.1 U1.3
OUT2: J5.2 J6.2 U1.1
OUT3: J8.1 J9.1 U2.3
OUT4: J8.2 J9.2 U2.1
OUT5: J15.1 J16.1 U3.3
OUT6: J15.2 J16.2 U3.1
OUT7: J22.1 J23.1 U4.3
OUT8: J22.2 J23.2 U4.1
OUT9: J29.1 J30.1 U5.3
OUT10: J29.2 J30.2 U5.1
OUT11: J36.1 J37.1 U6.3
OUT12: J36.2 J37.2 U6.1
OUT13: J43.1 J44.1 U7.3
OUT14: J43.2 J44.2 U7.1
OUT15: J50.1 J51.1 U8.3
OUT16: J50.2 J51.2 U8.1
OUT17: J57.1 J58.1 U9.3
OUT18: J57.2 J58.2 U9.1
OUT19: J64.1 J65.1 U10.3
OUT20: J64.2 J65.2 U10.1
OUT21: J71.1 J72.1 U11.3
OUT22: J71.2 J72.2 U11.1
OUT23: J78.1 J79.1 U12.3
OUT24: J78.2 J79.2 U12.1
OUT25: J85.1 J86.1 U13.3
OUT26: J85.2 J86.2 U13.1
OUT27: J92.1 J93.1 U14.3
OUT28: J92.2 J93.2 U14.1
OUT29: J99.1 J100.1 U15.3
OUT30: J99.2 J100.2 U15.1
OUT31: J106.1 J107.1 U16.3
OUT32: J106.2 J107.2 U16.1
SCL: J7.5 J7.6 R1.1 U1.10
SCL1: J10.5 J10.6 R6.1 U2.10
SCL2: J17.5 J17.6 R11.1 U3.10
SCL3: J24.5 J24.6 R16.1 U4.10
SCL4: J31.5 J31.6 R21.1 U5.10
SCL5: J38.5 J38.6 R26.1 U6.10
SCL6: J45.5 J45.6 R31.1 U7.10
SCL7: J52.5 J52.6 R36.1 U8.10
SCL8: J59.5 J59.6 R41.1 U9.10
SCL9: J66.5 J66.6 R46.1 U10.10
SCL10: J73.5 J73.6 R51.1 U11.10
SCL11: J80.5 J80.6 R56.1 U12.10
SCL12: J87.5 J87.6 R61.1 U13.10
SCL13: J94.5 J94.6 R66.1 U14.10
SCL14: J101.5 J101.6 R71.1 U15.10
SCL15: J108.5 J108.6 R76.1 U16.10
SDA: J7.3 J7.4 R2.1 U1.9
SDA1: J10.3 J10.4 R7.1 U2.9
SDA2: J17.3 J17.4 R12.1 U3.9
SDA3: J24.3 J24.4 R17.1 U4.9
SDA4: J31.3 J31.4 R22.1 U5.9
SDA5: J38.3 J38.4 R27.1 U6.9
SDA6: J45.3 J45.4 R32.1 U7.9
SDA7: J52.3 J52.4 R37.1 U8.9
SDA8: J59.3 J59.4 R42.1 U9.9
SDA9: J66.3 J66.4 R47.1 U10.9
SDA10: J73.3 J73.4 R52.1 U11.9
SDA11: J80.3 J80.4 R57.1 U12.9
SDA12: J87.3 J87.4 R62.1 U13.9
SDA13: J94.3 J94.4 R67.1 U14.9
SDA14: J101.3 J101.4 R72.1 U15.9
SDA15: J108.3 J108.4 R77.1 U16.9
VCC: C1.2 J1.2 J2.2 J3.2 J4.2 R1.2 R2.2 R4.2 R5.2 U1.4
VCC1: C2.2 J11.2 J12.2 J13.2 J14.2 R6.2 R7.2 R9.2 R10.2 U2.4
VCC2: C3.2 J18.2 J19.2 J20.2 J21.2 R11.2 R12.2 R14.2 R15.2 U3.4
VCC3: C4.2 J25.2 J26.2 J27.2 J28.2 R16.2 R17.2 R19.2 R20.2 U4.4
VCC4: C5.2 J32.2 J33.2 J34.2 J35.2 R21.2 R22.2 R24.2 R25.2 U5.4
VCC5: C6.2 J39.2 J40.2 J41.2 J42.2 R26.2 R27.2 R29.2 R30.2 U6.4
VCC6: C7.2 J46.2 J47.2 J48.2 J49.2 R31.2 R32.2 R34.2 R35.2 U7.4
VCC7: C8.2 J53.2 J54.2 J55.2 J56.2 R36.2 R37.2 R39.2 R40.2 U8.4
VCC8: C9.2 J60.2 J61.2 J62.2 J63.2 R41.2 R42.2 R44.2 R45.2 U9.4
VCC9: C10.2 J67.2 J68.2 J69.2 J70.2 R46.2 R47.2 R49.2 R50.2 U10.4
VCC10: C11.2 J74.2 J75.2 J76.2 J77.2 R51.2 R52.2 R54.2 R55.2 U11.4
VCC11: C12.2 J81.2 J82.2 J83.2 J84.2 R56.2 R57.2 R59.2 R60.2 U12.4
VCC12: C13.2 J88.2 J89.2 J90.2 J91.2 R61.2 R62.2 R64.2 R65.2 U13.4
VCC13: C14.2 J95.2 J96.2 J97.2 J98.2 R66.2 R67.2 R69.2 R70.2 U14.4
VCC14: C15.2 J102.2 J103.2 J104.2 J105.2 R71.2 R72.2 R74.2 R75.2 U15.4
VCC15: C16.2 J109.2 J110.2 J111.2 J112.2 R76.2 R77.2 R79.2 R80.2 U16.4